# EAGLE board 00A-010 (EAGLE 6.3)
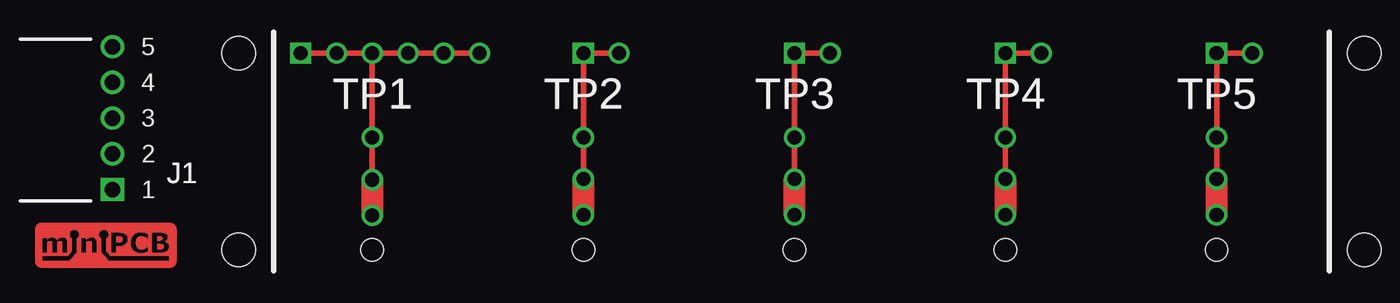
[diagram p0: board, top side]
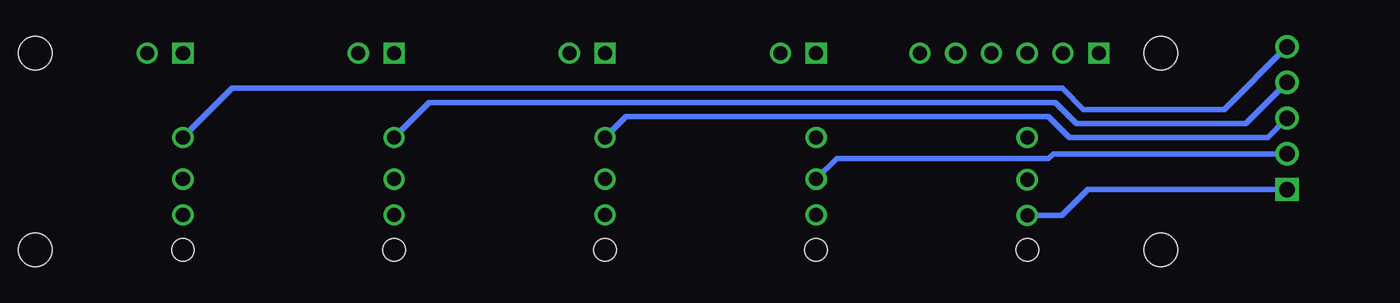
[diagram p1: board, bottom side, seen from below]

No outline drawn. Coordinates in mm, seen from the top.
Copper layers (1*16): Top 0.035mm / dielectric 1.5mm / Bottom 0.035mm
Design rules "minipcb": minimum track width 10mil, minimum drill 24mil, track to track 8mil, track to pad 8mil, pad to pad 8mil, via to via 8mil, smd to smd 8mil, copper to edge 40mil, drill to drill 8mil, minimum pad ring 10mil, minimum via ring 8mil, stop-mask expansion 4mil, vias tented up to drill 20mil, thermal gap 10mil
Holes 1.6 mm at 26,3 41,3 56,3 71,3 86,3

## Footprints (pad centres in the part's own frame; a part is rotated, then mirrored left to right if it is on the bottom)
MINIPCB_IDB20-X-05 = drill 1.1 square: 1 7.54,7.3 | drill 1.1: 2 7.54,9.84; 3 7.54,12.38; 4 7.54,14.92; 5 7.54,17.46 | hole 2.4: 96.5,3; 96.5,17; 16.5,3; 16.5,17
PINS_6_NOTEXT = drill 1 square: 1 0,0 | drill 1: 2 2.54,0; 3 5.08,0; 4 7.62,0; 5 10.16,0; 6 12.7,0
PINS_1_1MM_K = drill 1: 1 0,0; 2 2.54,0
PINS_2_NOTEXT = drill 1 square: 1 0,0 | drill 1: 2 2.54,0
PINS_1_TESTPOINT_KE5000 = drill 1: 1 0,0

## Placement (x,y rotation side)
J1  [MINIPCB_IDB20-X-05]  0,0 0 top
J2  [PINS_6_NOTEXT]  20.92,17 0 top
P1  [PINS_1_1MM_K]  26,8 270 top
P2  [PINS_2_NOTEXT]  41,17 0 top
P3  [PINS_2_NOTEXT]  56,17 0 top
P4  [PINS_2_NOTEXT]  71,17 0 top
P5  [PINS_2_NOTEXT]  86,17 0 top
P7  [PINS_1_1MM_K]  41,5.5 90 top
P8  [PINS_1_1MM_K]  56,5.5 90 top
P9  [PINS_1_1MM_K]  71,5.5 90 top
P10  [PINS_1_1MM_K]  86,5.5 90 top
TP1  [PINS_1_TESTPOINT_KE5000]  26,11 0 top
TP2  [PINS_1_TESTPOINT_KE5000]  41,11 0 top
TP3  [PINS_1_TESTPOINT_KE5000]  56,11 0 top
TP4  [PINS_1_TESTPOINT_KE5000]  71,11 0 top
TP5  [PINS_1_TESTPOINT_KE5000]  86,11 0 top

## Library data of the parts
J1 = minipcb; PART_NUMBER_REV: 00A-010-B
J2 P1-P5 P7-P10 TP1-TP5 = minipcb

## Nets
N$1: J1.2 P2.1 P2.2 P7.1 P7.2 TP2.1
N$2: J1.1 J2.1 J2.2 J2.3 J2.4 J2.5 J2.6 P1.1 P1.2 TP1.1
N$3: J1.3 P3.1 P3.2 P8.1 P8.2 TP3.1
N$4: J1.4 P4.1 P4.2 P9.1 P9.2 TP4.1
N$5: J1.5 P5.1 P5.2 P10.1 P10.2 TP5.1

## Tracks (layer width: path | path; a pad name or v marks a point on that pad's centre or on a via)
N$1
  Top 0.406: P7.1 P7.2 TP2.1 P2.1 P2.2
  Bottom 0.406: J1.2 24.16,9.84 24.5,9.5 39.54,9.5 P7.2
N$2
  Top 0.406: P1.2 P1.1 TP1.1 J2.3 | J2.1 J2.2 J2.3 | J2.3 J2.4 J2.5 J2.6
  Bottom 0.406: J1.1 21.7,7.3 23.54,5.46 P1.2
N$3
  Top 0.406: P8.1 P8.2 TP3.1 P3.1 P3.2
  Bottom 0.406: J1.3 8.92,11 23,11 24.5,12.5 54.5,12.5 TP3.1
N$4
  Top 0.406: P4.2 P4.1 TP4.1 P9.2 P9.1
  Bottom 0.406: J1.4 10.46,12 22.5,12 24,13.5 68.5,13.5 TP4.1
N$5
  Top 0.406: P5.2 P5.1 TP5.1 P10.2 P10.1
  Bottom 0.406: J1.5 12,13 22,13 23.5,14.5 82.5,14.5 TP5.1

## Text on the board
_tPlace: J1
_tNames: TP1 | TP2 | TP3 | TP4 | TP5